# Altium PCB S52最小系统.PcbDoc (part 9 of 9)
Units mm, origin at the board's own origin, x right, y up, seen from the top; angles counter-clockwise.
Board outline 152.4 x 101.6 mm, 2 copper layers (Top Layer, Bottom Layer); 29 components, 53 nets, 176 pads, 2 vias.
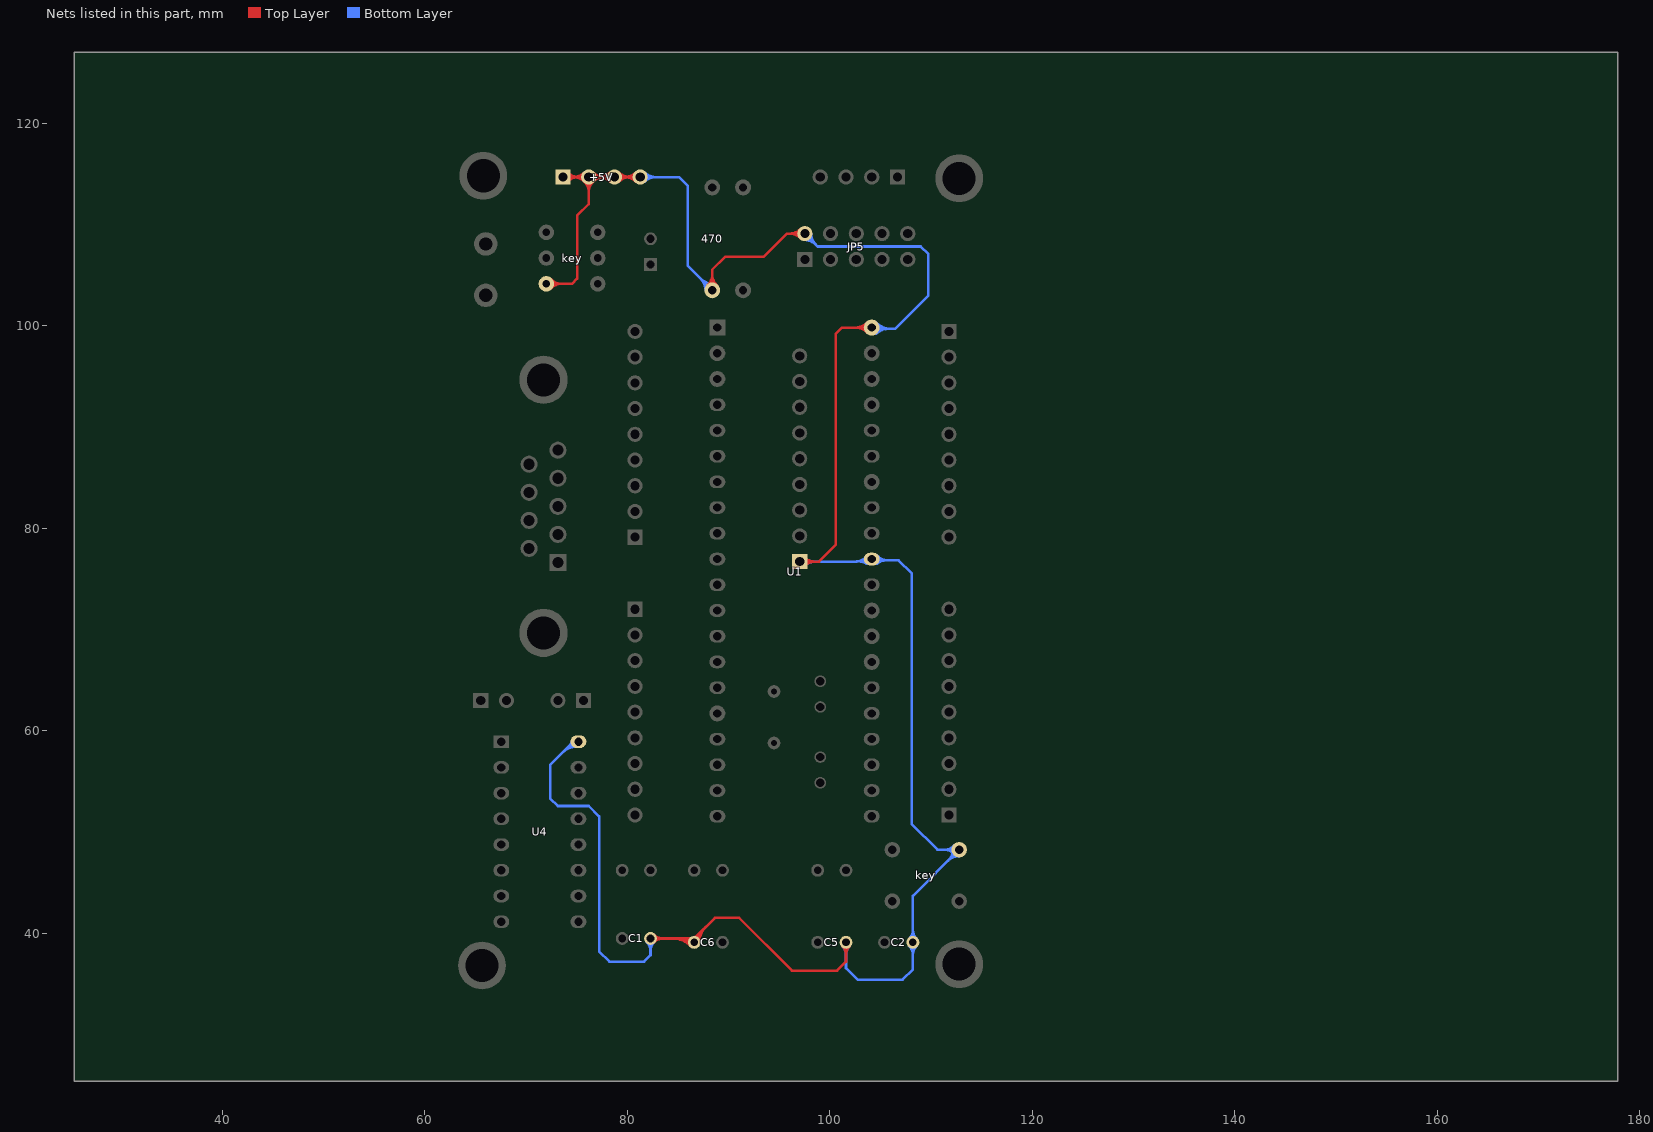
[diagram p9: the nets of this part, all layers, seen from the top]

## Via types
v1: diameter 1.27, hole 0.711, Top Layer to Bottom Layer, 2 vias

## Nets (pads, with @x,y where several pads share a name; then routed paths per layer and width w, separated by ;. In a path a pad name is that pad's centre, name@x,y a point inside that pad or via, vN(x,y) a via of type N, cw(c..) or ccw(c..) an arc to the next point about the centre after c; other vN are vias at no path point) (continued)
VCC: 470.1 +5V.1 +5V.2 +5V.3 +5V.4 ?.1 C1.1 C2.1 C5.1 C6.2 JP5.2 key.1@112.776,48.26 key.2@72.009,104.14 U1.31 U1.40 U4.16 | length 971.8
  Top Layer w0.254: key.2@72.009,104.14 74.549,104.14 75.057,104.648 75.057,110.871 76.2,112.014 +5V.2@76.2,114.681 ; +5V.1@73.66,114.681 +5V.4@81.28,114.681 ; C1.1@82.655,39.138 cw(c83.522,38.271) 83.522,39.497 ; C1.1@82.655,39.856 ccw(c83.522,40.723) 83.522,39.497 ; C6.2@86.487,39.497 C6.2@86.614,39.624 ; 470.1@88.393,103.501 88.393,105.538 89.662,106.807 93.472,106.807 95.758,109.093 JP5.2@97.536,109.093 ; ?.1@97.028,76.708 98.933,76.708 100.584,78.359 100.584,99.187 101.218,99.821 U1.40@104.136,99.821 ; C5.1@101.6,39.116 101.6,37.211 100.711,36.322 96.266,36.322 91.059,41.529 88.646,41.529 86.614,39.497 C6.2@86.614,39.116 ; key.2@72.278,103.871 cw(c72.929,103.22) 72.929,104.14 ; key.2@72.278,103.871 cw(c72.929,103.22) 72.929,104.14 ; key.2@72.278,103.871 cw(c72.929,103.22) 72.929,104.14 ; key.2@72.278,103.871 cw(c72.929,103.22) 72.929,104.14 ; key.2@72.278,103.871 cw(c72.929,103.22) 72.929,104.14 ; key.2@72.278,103.871 cw(c72.929,103.22) 72.929,104.14 ; key.2@72.278,104.409 ccw(c72.929,105.06) 72.929,104.14 ; key.2@72.278,104.409 ccw(c72.929,105.06) 72.929,104.14 ; key.2@72.278,104.409 ccw(c72.929,105.06) 72.929,104.14 ; key.2@72.278,104.409 ccw(c72.929,105.06) 72.929,104.14 ; key.2@72.278,104.409 ccw(c72.929,105.06) 72.929,104.14 ; key.2@72.278,104.409 ccw(c72.929,105.06) 72.929,104.14 ; key.2@72.458,103.691 cw(c73.542,102.607) 73.542,104.14 ; key.2@72.458,103.691 cw(c73.542,102.607) 73.542,104.14 ; key.2@72.458,103.691 cw(c73.542,102.607) 73.542,104.14 ; key.2@72.458,103.691 cw(c73.542,102.607) 73.542,104.14 ; key.2@72.458,103.691 cw(c73.542,102.607) 73.542,104.14 ; key.2@72.458,103.691 cw(c73.542,102.607) 73.542,104.14 ; key.2@72.458,104.589 ccw(c73.542,105.673) 73.542,104.14 ; key.2@72.458,104.589 ccw(c73.542,105.673) 73.542,104.14 ; key.2@72.458,104.589 ccw(c73.542,105.673) 73.542,104.14 ; key.2@72.458,104.589 ccw(c73.542,105.673) 73.542,104.14 ; key.2@72.458,104.589 ccw(c73.542,105.673) 73.542,104.14 ; key.2@72.458,104.589 ccw(c73.542,105.673) 73.542,104.14 ; +5V.1@73.921,114.42 cw(c74.551,113.79) 74.551,114.681 ; +5V.1@73.921,114.42 cw(c74.551,113.79) 74.551,114.681 ; +5V.1@73.921,114.42 cw(c74.551,113.79) 74.551,114.681 ; +5V.1@73.921,114.42 cw(c74.551,113.79) 74.551,114.681 ; +5V.1@73.921,114.42 cw(c74.551,113.79) 74.551,114.681 ; +5V.1@73.921,114.42 cw(c74.551,113.79) 74.551,114.681 ; +5V.1@73.921,114.42 cw(c74.551,113.79) 74.551,114.681 ; +5V.1@73.921,114.942 ccw(c74.551,115.572) 74.551,114.681 ; +5V.1@73.921,114.942 ccw(c74.551,115.572) 74.551,114.681 ; +5V.1@73.921,114.942 ccw(c74.551,115.572) 74.551,114.681 ; +5V.1@73.921,114.942 ccw(c74.551,115.572) 74.551,114.681 ; +5V.1@73.921,114.942 ccw(c74.551,115.572) 74.551,114.681 ; +5V.1@73.921,114.942 ccw(c74.551,115.572) 74.551,114.681 ; +5V.1@73.921,114.942 ccw(c74.551,115.572) 74.551,114.681 ; +5V.1@73.921,114.942 ccw(c74.551,115.572) 74.551,114.681 ; +5V.1@74.101,114.24 cw(c75.164,113.177) 75.164,114.681 ; +5V.1@74.101,114.24 cw(c75.164,113.177) 75.164,114.681 ; +5V.1@74.101,114.24 cw(c75.164,113.177) 75.164,114.681 ; +5V.1@74.101,114.24 cw(c75.164,113.177) 75.164,114.681 ; +5V.1@74.101,114.24 cw(c75.164,113.177) 75.164,114.681 ; +5V.1@74.101,114.24 cw(c75.164,113.177) 75.164,114.681 ; +5V.1@74.101,114.24 cw(c75.164,113.177) 75.164,114.681 ; +5V.1@74.101,114.24 cw(c75.164,113.177) 75.164,114.681 ; +5V.1@74.101,114.24 cw(c75.164,113.177) 75.164,114.681 ; +5V.1@74.101,114.24 cw(c75.164,113.177) 75.164,114.681 ; +5V.1@74.101,115.122 ccw(c75.164,116.185) 75.164,114.681 ; +5V.1@74.101,115.122 ccw(c75.164,116.185) 75.164,114.681 ; +5V.1@74.101,115.122 ccw(c75.164,116.185) 75.164,114.681 ; +5V.1@74.101,115.122 ccw(c75.164,116.185) 75.164,114.681 ; +5V.1@74.101,115.122 ccw(c75.164,116.185) 75.164,114.681 ; +5V.1@74.101,115.122 ccw(c75.164,116.185) 75.164,114.681 ; +5V.1@74.101,115.122 ccw(c75.164,116.185) 75.164,114.681 ; +5V.1@74.101,115.122 ccw(c75.164,116.185) 75.164,114.681 ; +5V.1@74.101,115.122 ccw(c75.164,116.185) 75.164,114.681 ; +5V.1@74.101,115.122 ccw(c75.164,116.185) 75.164,114.681 ; 74.696,114.681 cw(c74.696,113.177) +5V.2@75.759,114.24 ; 74.696,114.681 ccw(c74.696,116.185) +5V.2@75.759,115.122 ; 74.696,114.681 cw(c74.696,113.177) +5V.2@75.759,114.24 ; 74.696,114.681 ccw(c74.696,116.185) +5V.2@75.759,115.122 ; 74.696,114.681 cw(c74.696,113.177) +5V.2@75.759,114.24 ; 74.696,114.681 ccw(c74.696,116.185) +5V.2@75.759,115.122 ; 74.696,114.681 ccw(c74.696,116.185) +5V.2@75.759,115.122 ; 74.696,114.681 cw(c74.696,113.177) +5V.2@75.759,114.24 ; 74.696,114.681 ccw(c74.696,116.185) +5V.2@75.759,115.122 ; 74.696,114.681 cw(c74.696,113.177) +5V.2@75.759,114.24 ; 74.696,114.681 ccw(c74.696,116.185) +5V.2@75.759,115.122 ; 74.696,114.681 cw(c74.696,113.177) +5V.2@75.759,114.24 ; 74.696,114.681 ccw(c74.696,116.185) +5V.2@75.759,115.122 ; 74.696,114.681 cw(c74.696,113.177) +5V.2@75.759,114.24 ; 74.696,114.681 ccw(c74.696,116.185) +5V.2@75.759,115.122 ; 74.696,114.681 cw(c74.696,113.177) +5V.2@75.759,114.24 ; 74.696,114.681 ccw(c74.696,116.185) +5V.2@75.759,115.122 ; 74.696,114.681 cw(c74.696,113.177) +5V.2@75.759,114.24 ; 74.696,114.681 ccw(c74.696,116.185) +5V.2@75.759,115.122 ; 74.696,114.681 cw(c74.696,113.177) +5V.2@75.759,114.24 ; 75.309,114.681 cw(c75.309,113.79) +5V.2@75.939,114.42 ; 75.309,114.681 ccw(c75.309,115.572) +5V.2@75.939,114.942 ; 75.309,114.681 cw(c75.309,113.79) +5V.2@75.939,114.42 ; 75.309,114.681 ccw(c75.309,115.572) +5V.2@75.939,114.942 ; 75.309,114.681 cw(c75.309,113.79) +5V.2@75.939,114.42 ; 75.309,114.681 ccw(c75.309,115.572) +5V.2@75.939,114.942 ; 75.309,114.681 ccw(c75.309,115.572) +5V.2@75.939,114.942 ; 75.309,114.681 cw(c75.309,113.79) +5V.2@75.939,114.42 ; 75.309,114.681 ccw(c75.309,115.572) +5V.2@75.939,114.942 ; 75.309,114.681 cw(c75.309,113.79) +5V.2@75.939,114.42 ; 75.309,114.681 ccw(c75.309,115.572) +5V.2@75.939,114.942 ; 75.309,114.681 cw(c75.309,113.79) +5V.2@75.939,114.42 ; 75.309,114.681 ccw(c75.309,115.572) +5V.2@75.939,114.942 ; 75.309,114.681 cw(c75.309,113.79) +5V.2@75.939,114.42 ; 75.309,114.681 ccw(c75.309,115.572) +5V.2@75.939,114.942 ; 75.309,114.681 cw(c75.309,113.79) +5V.2@75.939,114.42 ; 75.309,114.681 ccw(c75.309,115.572) +5V.2@75.939,114.942 ; 75.309,114.681 cw(c75.309,113.79) +5V.2@75.939,114.42 ; 75.309,114.681 ccw(c75.309,115.572) +5V.2@75.939,114.942 ; 75.309,114.681 cw(c75.309,113.79) +5V.2@75.939,114.42 ; +5V.2@75.759,114.24 cw(c74.696,113.177) 76.2,113.177 ; +5V.2@75.759,114.24 cw(c74.696,113.177) 76.2,113.177 ; +5V.2@75.759,114.24 cw(c74.696,113.177) 76.2,113.177 ; +5V.2@75.759,114.24 cw(c74.696,113.177) 76.2,113.177 ; +5V.2@75.759,114.24 cw(c74.696,113.177) 76.2,113.177 ; +5V.2@75.759,114.24 cw(c74.696,113.177) 76.2,113.177 ; +5V.2@75.759,114.24 cw(c74.696,113.177) 76.2,113.177 ; +5V.2@75.939,114.42 cw(c75.309,113.79) 76.2,113.79 ; +5V.2@75.939,114.42 cw(c75.309,113.79) 76.2,113.79 ; +5V.2@75.939,114.42 cw(c75.309,113.79) 76.2,113.79 ; +5V.2@75.939,114.42 cw(c75.309,113.79) 76.2,113.79 ; +5V.2@75.939,114.42 cw(c75.309,113.79) 76.2,113.79 ; +5V.2@75.939,114.42 cw(c75.309,113.79) 76.2,113.79 ; +5V.2@75.939,114.42 cw(c75.309,113.79) 76.2,113.79 ; 76.2,113.177 cw(c77.704,113.177) +5V.2@76.641,114.24 ; 76.2,113.177 cw(c77.704,113.177) +5V.2@76.641,114.24 ; 76.2,113.177 cw(c77.704,113.177) +5V.2@76.641,114.24 ; 76.2,113.177 cw(c77.704,113.177) +5V.2@76.641,114.24 ; 76.2,113.177 cw(c77.704,113.177) +5V.2@76.641,114.24 ; 76.2,113.177 cw(c77.704,113.177) +5V.2@76.641,114.24 ; 76.2,113.177 cw(c77.704,113.177) +5V.2@76.641,114.24 ; 76.2,113.79 cw(c77.091,113.79) +5V.2@76.461,114.42 ; 76.2,113.79 cw(c77.091,113.79) +5V.2@76.461,114.42 ; 76.2,113.79 cw(c77.091,113.79) +5V.2@76.461,114.42 ; 76.2,113.79 cw(c77.091,113.79) +5V.2@76.461,114.42 ; 76.2,113.79 cw(c77.091,113.79) +5V.2@76.461,114.42 ; 76.2,113.79 cw(c77.091,113.79) +5V.2@76.461,114.42 ; 76.2,113.79 cw(c77.091,113.79) +5V.2@76.461,114.42 ; +5V.2@76.461,114.42 cw(c77.091,113.79) 77.091,114.681 ; +5V.2@76.461,114.42 cw(c77.091,113.79) 77.091,114.681 ; +5V.2@76.461,114.42 cw(c77.091,113.79) 77.091,114.681 ; +5V.2@76.461,114.42 cw(c77.091,113.79) 77.091,114.681 ; +5V.2@76.461,114.42 cw(c77.091,113.79) 77.091,114.681 ; +5V.2@76.461,114.42 cw(c77.091,113.79) 77.091,114.681 ; +5V.2@76.461,114.42 cw(c77.091,113.79) 77.091,114.681 ; +5V.2@76.461,114.42 cw(c77.091,113.79) 77.091,114.681 ; +5V.2@76.461,114.42 cw(c77.091,113.79) 77.091,114.681 ; +5V.2@76.461,114.42 cw(c77.091,113.79) 77.091,114.681 ; +5V.2@76.461,114.942 ccw(c77.091,115.572) 77.091,114.681 ; +5V.2@76.461,114.942 ccw(c77.091,115.572) 77.091,114.681 ; +5V.2@76.461,114.942 ccw(c77.091,115.572) 77.091,114.681 ; +5V.2@76.461,114.942 ccw(c77.091,115.572) 77.091,114.681 ; +5V.2@76.461,114.942 ccw(c77.091,115.572) 77.091,114.681 ; +5V.2@76.461,114.942 ccw(c77.091,115.572) 77.091,114.681 ; +5V.2@76.461,114.942 ccw(c77.091,115.572) 77.091,114.681 ; +5V.2@76.461,114.942 ccw(c77.091,115.572) 77.091,114.681 ; +5V.2@76.461,114.942 ccw(c77.091,115.572) 77.091,114.681 ; +5V.2@76.461,114.942 ccw(c77.091,115.572) 77.091,114.681 ; +5V.2@76.641,114.24 cw(c77.704,113.177) 77.704,114.681 ; +5V.2@76.641,114.24 cw(c77.704,113.177) 77.704,114.681 ; +5V.2@76.641,114.24 cw(c77.704,113.177) 77.704,114.681 ; +5V.2@76.641,114.24 cw(c77.704,113.177) 77.704,114.681 ; +5V.2@76.641,114.24 cw(c77.704,113.177) 77.704,114.681 ; +5V.2@76.641,114.24 cw(c77.704,113.177) 77.704,114.681 ; +5V.2@76.641,114.24 cw(c77.704,113.177) 77.704,114.681 ; +5V.2@76.641,114.24 cw(c77.704,113.177) 77.704,114.681 ; +5V.2@76.641,114.24 cw(c77.704,113.177) 77.704,114.681 ; +5V.2@76.641,114.24 cw(c77.704,113.177) 77.704,114.681 ; +5V.2@76.641,115.122 ccw(c77.704,116.185) 77.704,114.681 ; +5V.2@76.641,115.122 ccw(c77.704,116.185) 77.704,114.681 ; +5V.2@76.641,115.122 ccw(c77.704,116.185) 77.704,114.681 ; +5V.2@76.641,115.122 ccw(c77.704,116.185) 77.704,114.681 ; +5V.2@76.641,115.122 ccw(c77.704,116.185) 77.704,114.681 ; +5V.2@76.641,115.122 ccw(c77.704,116.185) 77.704,114.681 ; +5V.2@76.641,115.122 ccw(c77.704,116.185) 77.704,114.681 ; +5V.2@76.641,115.122 ccw(c77.704,116.185) 77.704,114.681 ; +5V.2@76.641,115.122 ccw(c77.704,116.185) 77.704,114.681 ; +5V.2@76.641,115.122 ccw(c77.704,116.185) 77.704,114.681 ; 77.236,114.681 cw(c77.236,113.177) +5V.3@78.299,114.24 ; 77.236,114.681 ccw(c77.236,116.185) +5V.3@78.299,115.122 ; 77.236,114.681 cw(c77.236,113.177) +5V.3@78.299,114.24 ; 77.236,114.681 ccw(c77.236,116.185) +5V.3@78.299,115.122 ; 77.236,114.681 cw(c77.236,113.177) +5V.3@78.299,114.24 ; 77.236,114.681 ccw(c77.236,116.185) +5V.3@78.299,115.122 ; 77.236,114.681 ccw(c77.236,116.185) +5V.3@78.299,115.122 ; 77.236,114.681 cw(c77.236,113.177) +5V.3@78.299,114.24 ; 77.236,114.681 ccw(c77.236,116.185) +5V.3@78.299,115.122 ; 77.236,114.681 cw(c77.236,113.177) +5V.3@78.299,114.24 ; 77.236,114.681 ccw(c77.236,116.185) +5V.3@78.299,115.122 ; 77.236,114.681 cw(c77.236,113.177) +5V.3@78.299,114.24 ; 77.236,114.681 ccw(c77.236,116.185) +5V.3@78.299,115.122 ; 77.236,114.681 cw(c77.236,113.177) +5V.3@78.299,114.24 ; 77.236,114.681 ccw(c77.236,116.185) +5V.3@78.299,115.122 ; 77.236,114.681 cw(c77.236,113.177) +5V.3@78.299,114.24 ; 77.236,114.681 ccw(c77.236,116.185) +5V.3@78.299,115.122 ; 77.236,114.681 cw(c77.236,113.177) +5V.3@78.299,114.24 ; 77.236,114.681 ccw(c77.236,116.185) +5V.3@78.299,115.122 ; 77.236,114.681 cw(c77.236,113.177) +5V.3@78.299,114.24 ; 77.849,114.681 cw(c77.849,113.79) +5V.3@78.479,114.42 ; 77.849,114.681 ccw(c77.849,115.572) +5V.3@78.479,114.942 ; 77.849,114.681 cw(c77.849,113.79) +5V.3@78.479,114.42 ; 77.849,114.681 ccw(c77.849,115.572) +5V.3@78.479,114.942 ; 77.849,114.681 cw(c77.849,113.79) +5V.3@78.479,114.42 ; 77.849,114.681 ccw(c77.849,115.572) +5V.3@78.479,114.942 ; 77.849,114.681 ccw(c77.849,115.572) +5V.3@78.479,114.942 ; 77.849,114.681 cw(c77.849,113.79) +5V.3@78.479,114.42 ; 77.849,114.681 ccw(c77.849,115.572) +5V.3@78.479,114.942 ; 77.849,114.681 cw(c77.849,113.79) +5V.3@78.479,114.42 ; 77.849,114.681 ccw(c77.849,115.572) +5V.3@78.479,114.942 ; 77.849,114.681 cw(c77.849,113.79) +5V.3@78.479,114.42 ; 77.849,114.681 ccw(c77.849,115.572) +5V.3@78.479,114.942 ; 77.849,114.681 cw(c77.849,113.79) +5V.3@78.479,114.42 ; 77.849,114.681 ccw(c77.849,115.572) +5V.3@78.479,114.942 ; 77.849,114.681 cw(c77.849,113.79) +5V.3@78.479,114.42 ; 77.849,114.681 ccw(c77.849,115.572) +5V.3@78.479,114.942 ; 77.849,114.681 cw(c77.849,113.79) +5V.3@78.479,114.42 ; 77.849,114.681 ccw(c77.849,115.572) +5V.3@78.479,114.942 ; 77.849,114.681 cw(c77.849,113.79) +5V.3@78.479,114.42 ; +5V.3@79.001,114.42 cw(c79.631,113.79) 79.631,114.681 ; +5V.3@79.001,114.42 cw(c79.631,113.79) 79.631,114.681 ; +5V.3@79.001,114.42 cw(c79.631,113.79) 79.631,114.681 ; +5V.3@79.001,114.42 cw(c79.631,113.79) 79.631,114.681 ; +5V.3@79.001,114.42 cw(c79.631,113.79) 79.631,114.681 ; +5V.3@79.001,114.42 cw(c79.631,113.79) 79.631,114.681 ; +5V.3@79.001,114.42 cw(c79.631,113.79) 79.631,114.681 ; +5V.3@79.001,114.42 cw(c79.631,113.79) 79.631,114.681 ; +5V.3@79.001,114.42 cw(c79.631,113.79) 79.631,114.681 ; +5V.3@79.001,114.42 cw(c79.631,113.79) 79.631,114.681 ; +5V.3@79.001,114.942 ccw(c79.631,115.572) 79.631,114.681 ; +5V.3@79.001,114.942 ccw(c79.631,115.572) 79.631,114.681 ; +5V.3@79.001,114.942 ccw(c79.631,115.572) 79.631,114.681 ; +5V.3@79.001,114.942 ccw(c79.631,115.572) 79.631,114.681 ; +5V.3@79.001,114.942 ccw(c79.631,115.572) 79.631,114.681 ; +5V.3@79.001,114.942 ccw(c79.631,115.572) 79.631,114.681 ; +5V.3@79.001,114.942 ccw(c79.631,115.572) 79.631,114.681 ; +5V.3@79.001,114.942 ccw(c79.631,115.572) 79.631,114.681 ; +5V.3@79.001,114.942 ccw(c79.631,115.572) 79.631,114.681 ; +5V.3@79.001,114.942 ccw(c79.631,115.572) 79.631,114.681 ; +5V.3@79.181,114.24 cw(c80.244,113.177) 80.244,114.681 ; +5V.3@79.181,114.24 cw(c80.244,113.177) 80.244,114.681 ; +5V.3@79.181,114.24 cw(c80.244,113.177) 80.244,114.681 ; +5V.3@79.181,114.24 cw(c80.244,113.177) 80.244,114.681 ; +5V.3@79.181,114.24 cw(c80.244,113.177) 80.244,114.681 ; +5V.3@79.181,114.24 cw(c80.244,113.177) 80.244,114.681 ; +5V.3@79.181,114.24 cw(c80.244,113.177) 80.244,114.681 ; +5V.3@79.181,114.24 cw(c80.244,113.177) 80.244,114.681 ; +5V.3@79.181,114.24 cw(c80.244,113.177) 80.244,114.681 ; +5V.3@79.181,114.24 cw(c80.244,113.177) 80.244,114.681 ; +5V.3@79.181,115.122 ccw(c80.244,116.185) 80.244,114.681 ; +5V.3@79.181,115.122 ccw(c80.244,116.185) 80.244,114.681 ; +5V.3@79.181,115.122 ccw(c80.244,116.185) 80.244,114.681 ; +5V.3@79.181,115.122 ccw(c80.244,116.185) 80.244,114.681 ; +5V.3@79.181,115.122 ccw(c80.244,116.185) 80.244,114.681 ; +5V.3@79.181,115.122 ccw(c80.244,116.185) 80.244,114.681 ; +5V.3@79.181,115.122 ccw(c80.244,116.185) 80.244,114.681 ; +5V.3@79.181,115.122 ccw(c80.244,116.185) 80.244,114.681 ; +5V.3@79.181,115.122 ccw(c80.244,116.185) 80.244,114.681 ; +5V.3@79.181,115.122 ccw(c80.244,116.185) 80.244,114.681 ; 79.776,114.681 cw(c79.776,113.177) +5V.4@80.839,114.24 ; 79.776,114.681 ccw(c79.776,116.185) +5V.4@80.839,115.122 ; 79.776,114.681 cw(c79.776,113.177) +5V.4@80.839,114.24 ; 79.776,114.681 ccw(c79.776,116.185) +5V.4@80.839,115.122 ; 79.776,114.681 cw(c79.776,113.177) +5V.4@80.839,114.24 ; 79.776,114.681 ccw(c79.776,116.185) +5V.4@80.839,115.122 ; 79.776,114.681 ccw(c79.776,116.185) +5V.4@80.839,115.122 ; 79.776,114.681 cw(c79.776,113.177) +5V.4@80.839,114.24 ; 79.776,114.681 ccw(c79.776,116.185) +5V.4@80.839,115.122 ; 79.776,114.681 cw(c79.776,113.177) +5V.4@80.839,114.24 ; 79.776,114.681 ccw(c79.776,116.185) +5V.4@80.839,115.122 ; 79.776,114.681 cw(c79.776,113.177) +5V.4@80.839,114.24 ; 79.776,114.681 ccw(c79.776,116.185) +5V.4@80.839,115.122 ; 79.776,114.681 cw(c79.776,113.177) +5V.4@80.839,114.24 ; 79.776,114.681 ccw(c79.776,116.185) +5V.4@80.839,115.122 ; 79.776,114.681 cw(c79.776,113.177) +5V.4@80.839,114.24 ; 79.776,114.681 ccw(c79.776,116.185) +5V.4@80.839,115.122 ; 79.776,114.681 cw(c79.776,113.177) +5V.4@80.839,114.24 ; 79.776,114.681 ccw(c79.776,116.185) +5V.4@80.839,115.122 ; 79.776,114.681 cw(c79.776,113.177) +5V.4@80.839,114.24 ; 80.389,114.681 cw(c80.389,113.79) +5V.4@81.019,114.42 ; 80.389,114.681 ccw(c80.389,115.572) +5V.4@81.019,114.942 ; 80.389,114.681 cw(c80.389,113.79) +5V.4@81.019,114.42 ; 80.389,114.681 ccw(c80.389,115.572) +5V.4@81.019,114.942 ; 80.389,114.681 cw(c80.389,113.79) +5V.4@81.019,114.42 ; 80.389,114.681 ccw(c80.389,115.572) +5V.4@81.019,114.942 ; 80.389,114.681 ccw(c80.389,115.572) +5V.4@81.019,114.942 ; 80.389,114.681 cw(c80.389,113.79) +5V.4@81.019,114.42 ; 80.389,114.681 ccw(c80.389,115.572) +5V.4@81.019,114.942 ; 80.389,114.681 cw(c80.389,113.79) +5V.4@81.019,114.42 ; 80.389,114.681 ccw(c80.389,115.572) +5V.4@81.019,114.942 ; 80.389,114.681 cw(c80.389,113.79) +5V.4@81.019,114.42 ; 80.389,114.681 ccw(c80.389,115.572) +5V.4@81.019,114.942 ; 80.389,114.681 cw(c80.389,113.79) +5V.4@81.019,114.42 ; 80.389,114.681 ccw(c80.389,115.572) +5V.4@81.019,114.942 ; 80.389,114.681 cw(c80.389,113.79) +5V.4@81.019,114.42 ; 80.389,114.681 ccw(c80.389,115.572) +5V.4@81.019,114.942 ; 80.389,114.681 cw(c80.389,113.79) +5V.4@81.019,114.42 ; 80.389,114.681 ccw(c80.389,115.572) +5V.4@81.019,114.942 ; 80.389,114.681 cw(c80.389,113.79) +5V.4@81.019,114.42 ; 83.522,39.497 86.233,39.497 C6.2@86.614,39.116 ; 84.468,39.497 cw(c84.468,36.97) C6.2@86.255,38.757 ; 84.468,39.497 cw(c84.468,36.97) C6.2@86.255,38.757 ; 84.468,39.497 cw(c84.468,36.97) C6.2@86.255,38.757 ; 84.468,39.497 cw(c84.468,36.97) C6.2@86.255,38.757 ; 84.468,39.497 cw(c84.468,36.97) C6.2@86.255,38.757 ; 84.468,39.497 cw(c84.468,36.97) C6.2@86.255,38.757 ; 84.468,39.497 cw(c84.468,36.97) C6.2@86.255,38.757 ; 84.468,39.497 cw(c84.468,36.97) C6.2@86.255,38.757 ; 84.468,39.497 cw(c84.468,36.97) C6.2@86.255,38.757 ; 85.081,39.497 cw(c85.081,37.583) C6.2@86.434,38.936 ; 85.081,39.497 cw(c85.081,37.583) C6.2@86.434,38.936 ; 85.081,39.497 cw(c85.081,37.583) C6.2@86.434,38.936 ; 85.081,39.497 cw(c85.081,37.583) C6.2@86.434,38.936 ; 85.081,39.497 cw(c85.081,37.583) C6.2@86.434,38.936 ; 85.081,39.497 cw(c85.081,37.583) C6.2@86.434,38.936 ; 85.081,39.497 cw(c85.081,37.583) C6.2@86.434,38.936 ; 85.081,39.497 cw(c85.081,37.583) C6.2@86.434,38.936 ; 85.081,39.497 cw(c85.081,37.583) C6.2@86.434,38.936 ; 85.694,39.497 cw(c85.694,38.196) C6.2@86.614,39.116 ; 85.694,39.497 cw(c85.694,38.196) C6.2@86.614,39.116 ; 85.694,39.497 cw(c85.694,38.196) C6.2@86.614,39.116 ; 85.694,39.497 cw(c85.694,38.196) C6.2@86.614,39.116 ; 85.694,39.497 cw(c85.694,38.196) C6.2@86.614,39.116 ; 85.694,39.497 cw(c85.694,38.196) C6.2@86.614,39.116 ; 85.694,39.497 cw(c85.694,38.196) C6.2@86.614,39.116 ; 85.694,39.497 cw(c85.694,38.196) C6.2@86.614,39.116 ; 85.694,39.497 cw(c85.694,38.196) C6.2@86.614,39.116 ; C6.2@86.614,39.116 cw(c87.534,39.116) 86.883,39.766 ; C6.2@86.614,39.116 cw(c87.534,39.116) 86.883,39.766 ; C6.2@86.614,39.116 cw(c87.534,39.116) 86.883,39.766 ; C6.2@86.614,39.116 cw(c87.534,39.116) 86.883,39.766 ; C6.2@86.614,39.116 cw(c87.534,39.116) 86.883,39.766 ; C6.2@86.614,39.116 cw(c87.534,39.116) 86.883,39.766 ; C6.2@86.614,39.116 cw(c87.534,39.116) 86.883,39.766 ; C6.2@86.614,39.116 cw(c87.534,39.116) 86.883,39.766 ; C6.2@86.614,39.116 cw(c87.534,39.116) 86.883,39.766 ; C6.2@86.614,39.624 ccw(c86.614,39.931) 86.831,39.714 ; C6.2@86.614,39.624 ccw(c86.614,39.931) 86.831,39.714 ; C6.2@86.614,39.624 ccw(c86.614,39.931) 86.831,39.714 ; C6.2@86.614,39.624 ccw(c86.614,39.931) 86.831,39.714 ; C6.2@86.614,39.624 ccw(c86.614,39.931) 86.831,39.714 ; C6.2@86.614,39.624 ccw(c86.614,39.931) 86.831,39.714 ; C6.2@86.614,39.624 ccw(c86.614,39.931) 86.831,39.714 ; C6.2@86.614,39.624 ccw(c86.614,39.931) 86.831,39.714 ; C6.2@86.614,39.624 ccw(c86.614,39.931) 86.831,39.714 ; C6.2@86.868,39.116 cw(c88.401,39.116) 87.317,40.2 ; C6.2@86.868,39.116 cw(c88.401,39.116) 87.317,40.2 ; C6.2@86.868,39.116 cw(c88.401,39.116) 87.317,40.2 ; C6.2@86.868,39.116 cw(c88.401,39.116) 87.317,40.2 ; C6.2@86.868,39.116 cw(c88.401,39.116) 87.317,40.2 ; C6.2@86.868,39.116 cw(c88.401,39.116) 87.317,40.2 ; C6.2@86.868,39.116 cw(c88.401,39.116) 87.317,40.2 ; C6.2@86.868,39.116 cw(c88.401,39.116) 87.317,40.2 ; C6.2@86.868,39.116 cw(c88.401,39.116) 87.317,40.2 ; C6.2@87.122,39.116 cw(c89.268,39.116) 87.751,40.634 ; C6.2@87.122,39.116 cw(c89.268,39.116) 87.751,40.634 ; C6.2@87.122,39.116 cw(c89.268,39.116) 87.751,40.634 ; C6.2@87.122,39.116 cw(c89.268,39.116) 87.751,40.634 ; C6.2@87.122,39.116 cw(c89.268,39.116) 87.751,40.634 ; C6.2@87.122,39.116 cw(c89.268,39.116) 87.751,40.634 ; C6.2@87.122,39.116 cw(c89.268,39.116) 87.751,40.634 ; C6.2@87.122,39.116 cw(c89.268,39.116) 87.751,40.634 ; C6.2@87.122,39.116 cw(c89.268,39.116) 87.751,40.634 ; 470.1@87.926,103.968 ccw(c86.799,105.096) 88.393,105.096 ; 470.1@87.926,103.968 ccw(c86.799,105.096) 88.393,105.096 ; 470.1@87.926,103.968 ccw(c86.799,105.096) 88.393,105.096 ; 470.1@87.926,103.968 ccw(c86.799,105.096) 88.393,105.096 ; 470.1@87.926,103.968 ccw(c86.799,105.096) 88.393,105.096 ; 470.1@87.926,103.968 ccw(c86.799,105.096) 88.393,105.096 ; 470.1@87.926,103.968 ccw(c86.799,105.096) 88.393,105.096 ; 470.1@87.926,103.968 ccw(c86.799,105.096) 88.393,105.096 ; 470.1@87.926,103.968 ccw(c86.799,105.096) 88.393,105.096 ; 470.1@87.926,103.968 ccw(c86.799,105.096) 88.393,105.096 ; 470.1@88.106,103.789 ccw(c87.412,104.482) 88.393,104.482 ; 470.1@88.106,103.789 ccw(c87.412,104.482) 88.393,104.482 ; 470.1@88.106,103.789 ccw(c87.412,104.482) 88.393,104.482 ; 470.1@88.106,103.789 ccw(c87.412,104.482) 88.393,104.482 ; 470.1@88.106,103.789 ccw(c87.412,104.482) 88.393,104.482 ; 470.1@88.106,103.789 ccw(c87.412,104.482) 88.393,104.482 ; 470.1@88.106,103.789 ccw(c87.412,104.482) 88.393,104.482 ; 470.1@88.106,103.789 ccw(c87.412,104.482) 88.393,104.482 ; 470.1@88.106,103.789 ccw(c87.412,104.482) 88.393,104.482 ; 470.1@88.106,103.789 ccw(c87.412,104.482) 88.393,104.482 ; 88.393,104.482 ccw(c89.374,104.482) 470.1@88.68,103.789 ; 88.393,104.482 ccw(c89.374,104.482) 470.1@88.68,103.789 ; 88.393,104.482 ccw(c89.374,104.482) 470.1@88.68,103.789 ; 88.393,104.482 ccw(c89.374,104.482) 470.1@88.68,103.789 ; 88.393,104.482 ccw(c89.374,104.482) 470.1@88.68,103.789 ; 88.393,104.482 ccw(c89.374,104.482) 470.1@88.68,103.789 ; 88.393,104.482 ccw(c89.374,104.482) 470.1@88.68,103.789 ; 88.393,104.482 ccw(c89.374,104.482) 470.1@88.68,103.789 ; 88.393,104.482 ccw(c89.374,104.482) 470.1@88.68,103.789 ; 88.393,104.482 ccw(c89.374,104.482) 470.1@88.68,103.789 ; 88.393,105.096 ccw(c89.987,105.096) 470.1@88.86,103.968 ; 88.393,105.096 ccw(c89.987,105.096) 470.1@88.86,103.968 ; 88.393,105.096 ccw(c89.987,105.096) 470.1@88.86,103.968 ; 88.393,105.096 ccw(c89.987,105.096) 470.1@88.86,103.968 ; 88.393,105.096 ccw(c89.987,105.096) 470.1@88.86,103.968 ; 88.393,105.096 ccw(c89.987,105.096) 470.1@88.86,103.968 ; 88.393,105.096 ccw(c89.987,105.096) 470.1@88.86,103.968 ; 88.393,105.096 ccw(c89.987,105.096) 470.1@88.86,103.968 ; 88.393,105.096 ccw(c89.987,105.096) 470.1@88.86,103.968 ; 88.393,105.096 ccw(c89.987,105.096) 470.1@88.86,103.968 ; 96.032,109.093 cw(c96.032,107.589) JP5.2@97.095,108.652 ; 96.032,109.093 ccw(c96.032,110.597) JP5.2@97.095,109.534 ; 96.032,109.093 cw(c96.032,107.589) JP5.2@97.095,108.652 ; 96.032,109.093 ccw(c96.032,110.597) JP5.2@97.095,109.534 ; 96.032,109.093 cw(c96.032,107.589) JP5.2@97.095,108.652 ; 96.032,109.093 ccw(c96.032,110.597) JP5.2@97.095,109.534 ; 96.032,109.093 ccw(c96.032,110.597) JP5.2@97.095,109.534 ; 96.032,109.093 cw(c96.032,107.589) JP5.2@97.095,108.652 ; 96.032,109.093 ccw(c96.032,110.597) JP5.2@97.095,109.534 ; 96.032,109.093 cw(c96.032,107.589) JP5.2@97.095,108.652 ; 96.032,109.093 ccw(c96.032,110.597) JP5.2@97.095,109.534 ; 96.032,109.093 cw(c96.032,107.589) JP5.2@97.095,108.652 ; 96.032,109.093 ccw(c96.032,110.597) JP5.2@97.095,109.534 ; 96.032,109.093 cw(c96.032,107.589) JP5.2@97.095,108.652 ; 96.032,109.093 ccw(c96.032,110.597) JP5.2@97.095,109.534 ; 96.032,109.093 cw(c96.032,107.589) JP5.2@97.095,108.652 ; 96.032,109.093 ccw(c96.032,110.597) JP5.2@97.095,109.534 ; 96.032,109.093 cw(c96.032,107.589) JP5.2@97.095,108.652 ; 96.032,109.093 ccw(c96.032,110.597) JP5.2@97.095,109.534 ; 96.032,109.093 cw(c96.032,107.589) JP5.2@97.095,108.652 ; 96.645,109.093 cw(c96.645,108.202) JP5.2@97.275,108.832 ; 96.645,109.093 ccw(c96.645,109.984) JP5.2@97.275,109.354 ; 96.645,109.093 cw(c96.645,108.202) JP5.2@97.275,108.832 ; 96.645,109.093 ccw(c96.645,109.984) JP5.2@97.275,109.354 ; 96.645,109.093 cw(c96.645,108.202) JP5.2@97.275,108.832 ; 96.645,109.093 ccw(c96.645,109.984) JP5.2@97.275,109.354 ; 96.645,109.093 ccw(c96.645,109.984) JP5.2@97.275,109.354 ; 96.645,109.093 cw(c96.645,108.202) JP5.2@97.275,108.832 ; 96.645,109.093 ccw(c96.645,109.984) JP5.2@97.275,109.354 ; 96.645,109.093 cw(c96.645,108.202) JP5.2@97.275,108.832 ; 96.645,109.093 ccw(c96.645,109.984) JP5.2@97.275,109.354 ; 96.645,109.093 cw(c96.645,108.202) JP5.2@97.275,108.832 ; 96.645,109.093 ccw(c96.645,109.984) JP5.2@97.275,109.354 ; 96.645,109.093 cw(c96.645,108.202) JP5.2@97.275,108.832 ; 96.645,109.093 ccw(c96.645,109.984) JP5.2@97.275,109.354 ; 96.645,109.093 cw(c96.645,108.202) JP5.2@97.275,108.832 ; 96.645,109.093 ccw(c96.645,109.984) JP5.2@97.275,109.354 ; 96.645,109.093 cw(c96.645,108.202) JP5.2@97.275,108.832 ; 96.645,109.093 ccw(c96.645,109.984) JP5.2@97.275,109.354 ; 96.645,109.093 cw(c96.645,108.202) JP5.2@97.275,108.832 ; ?.1@97.289,76.447 cw(c97.919,75.817) 97.919,76.708 ; ?.1@97.289,76.447 cw(c97.919,75.817) 97.919,76.708 ; ?.1@97.289,76.447 cw(c97.919,75.817) 97.919,76.708 ; ?.1@97.289,76.969 ccw(c97.919,77.599) 97.919,76.708 ; ?.1@97.289,76.969 ccw(c97.919,77.599) 97.919,76.708 ; ?.1@97.289,76.969 ccw(c97.919,77.599) 97.919,76.708 ; ?.1@97.469,76.267 cw(c98.532,75.204) 98.532,76.708 ; ?.1@97.469,76.267 cw(c98.532,75.204) 98.532,76.708 ; ?.1@97.469,76.267 cw(c98.532,75.204) 98.532,76.708 ; ?.1@97.469,77.149 ccw(c98.532,78.212) 98.532,76.708 ; ?.1@97.469,77.149 ccw(c98.532,78.212) 98.532,76.708 ; ?.1@97.469,77.149 ccw(c98.532,78.212) 98.532,76.708 ; C5.1@101.241,38.757 cw(c100.374,37.89) 101.6,37.89 ; C5.1@101.241,38.757 cw(c100.374,37.89) 101.6,37.89 ; C5.1@101.241,38.757 cw(c100.374,37.89) 101.6,37.89 ; C5.1@101.241,38.757 cw(c100.374,37.89) 101.6,37.89 ; C5.1@101.241,38.757 cw(c100.374,37.89) 101.6,37.89 ; C5.1@101.241,38.757 cw(c100.374,37.89) 101.6,37.89 ; C5.1@101.241,38.757 cw(c100.374,37.89) 101.6,37.89 ; C5.1@101.241,38.757 cw(c100.374,37.89) 101.6,37.89 ; C5.1@101.241,38.757 cw(c100.374,37.89) 101.6,37.89 ; 101.6,37.89 cw(c102.826,37.89) C5.1@101.959,38.757 ; 101.6,37.89 cw(c102.826,37.89) C5.1@101.959,38.757 ; 101.6,37.89 cw(c102.826,37.89) C5.1@101.959,38.757 ; 101.6,37.89 cw(c102.826,37.89) C5.1@101.959,38.757 ; 101.6,37.89 cw(c102.826,37.89) C5.1@101.959,38.757 ; 101.6,37.89 cw(c102.826,37.89) C5.1@101.959,38.757 ; 101.6,37.89 cw(c102.826,37.89) C5.1@101.959,38.757 ; 101.6,37.89 cw(c102.826,37.89) C5.1@101.959,38.757 ; 101.6,37.89 cw(c102.826,37.89) C5.1@101.959,38.757 ; 102.542,99.821 cw(c102.542,98.227) U1.40@103.669,99.354 ; 102.542,99.821 ccw(c102.542,101.415) U1.40@103.669,100.288 ; 102.542,99.821 cw(c102.542,98.227) U1.40@103.669,99.354 ; 102.542,99.821 ccw(c102.542,101.415) U1.40@103.669,100.288 ; 102.542,99.821 ccw(c102.542,101.415) U1.40@103.669,100.288 ; 102.542,99.821 cw(c102.542,98.227) U1.40@103.669,99.354 ; 103.155,99.821 cw(c103.155,98.84) U1.40@103.849,99.534 ; 103.155,99.821 ccw(c103.155,100.802) U1.40@103.849,100.108 ; 103.155,99.821 cw(c103.155,98.84) U1.40@103.849,99.534 ; 103.155,99.821 ccw(c103.155,100.802) U1.40@103.849,100.108 ; 103.155,99.821 ccw(c103.155,100.802) U1.40@103.849,100.108 ; 103.155,99.821 cw(c103.155,98.84) U1.40@103.849,99.534
  Bottom Layer w0.254: U4.16@75.18,58.927 74.675,58.927 72.39,56.642 72.39,53.34 73.152,52.578 76.2,52.578 77.216,51.562 77.216,38.227 78.232,37.211 81.661,37.211 82.296,37.846 C1.1@82.296,39.497 ; +5V.4@81.28,114.681 85.09,114.681 85.979,113.792 85.979,105.915 470.1@88.393,103.501 ; ?.1@97.028,76.708 102.467,76.708 ccw(c102.467,78.341) U1.31@103.622,77.186 ; JP5.2@97.536,108.47 cw(c97.536,106.966) 98.6,108.029 cw(c99.663,109.093) JP5.2@98.159,109.093 ; JP5.2@97.536,108.724 cw(c97.536,107.833) 98.166,108.463 cw(c98.796,109.093) JP5.2@97.905,109.093 ; JP5.2@97.536,109.093 98.806,107.823 108.966,107.823 109.728,107.061 109.728,102.997 106.425,99.694 U1.40@104.136,99.694 ; C5.1@101.6,39.116 101.6,36.576 102.743,35.433 107.188,35.433 108.204,36.449 108.204,43.688 key.1@112.776,48.26 110.617,48.26 108.078,50.799 108.078,75.562 106.806,76.834 U1.31@104.136,76.834 ; 103.076,76.708 cw(c103.076,75.936) U1.31@103.622,76.482 ; 103.08,76.708 ccw(c103.08,77.727) U1.31@103.801,77.007 ; U1.40@104.424,99.407 cw(c105.117,98.713) 105.117,99.694 cw(c105.117,100.675) U1.40@104.424,99.981 ; U1.31@104.651,76.482 cw(c105.501,75.632) 105.501,76.834 cw(c105.501,78.036) U1.31@104.651,77.186 ; 73.582,57.834 cw(c75.018,56.399) U4.16@75.018,58.429 ; 73.582,57.834 cw(c75.018,56.399) U4.16@75.018,58.429 ; 73.582,57.834 cw(c75.018,56.399) U4.16@75.018,58.429 ; 73.582,57.834 cw(c75.018,56.399) U4.16@75.018,58.429 ; 73.582,57.834 cw(c75.018,56.399) U4.16@75.018,58.429 ; 73.582,57.834 cw(c75.018,56.399) U4.16@75.018,58.429 ; 73.582,57.834 cw(c75.018,56.399) U4.16@75.018,58.429 ; 73.582,57.834 cw(c75.018,56.399) U4.16@75.018,58.429 ; 73.582,57.834 cw(c75.018,56.399) U4.16@75.018,58.429 ; 73.582,57.834 cw(c75.018,56.399) U4.16@75.018,58.429 ; 74.016,58.268 cw(c75.018,57.266) U4.16@75.018,58.683 ; 74.016,58.268 cw(c75.018,57.266) U4.16@75.018,58.683 ; 74.016,58.268 cw(c75.018,57.266) U4.16@75.018,58.683 ; 74.016,58.268 cw(c75.018,57.266) U4.16@75.018,58.683 ; 74.016,58.268 cw(c75.018,57.266) U4.16@75.018,58.683 ; 74.016,58.268 cw(c75.018,57.266) U4.16@75.018,58.683 ; 74.016,58.268 cw(c75.018,57.266) U4.16@75.018,58.683 ; 74.016,58.268 cw(c75.018,57.266) U4.16@75.018,58.683 ; 74.016,58.268 cw(c75.018,57.266) U4.16@75.018,58.683 ; 74.016,58.268 cw(c75.018,57.266) U4.16@75.018,58.683 ; 74.41,58.662 ccw(c74.145,58.927) U4.16@74.52,58.927 ; 74.41,58.662 ccw(c74.145,58.927) U4.16@74.52,58.927 ; 74.41,58.662 ccw(c74.145,58.927) U4.16@74.52,58.927 ; 74.41,58.662 ccw(c74.145,58.927) U4.16@74.52,58.927 ; 74.41,58.662 ccw(c74.145,58.927) U4.16@74.52,58.927 ; 74.41,58.662 ccw(c74.145,58.927) U4.16@74.52,58.927 ; 74.41,58.662 ccw(c74.145,58.927) U4.16@74.52,58.927 ; 74.41,58.662 ccw(c74.145,58.927) U4.16@74.52,58.927 ; 74.41,58.662 ccw(c74.145,58.927) U4.16@74.52,58.927 ; 74.41,58.662 ccw(c74.145,58.927) U4.16@74.52,58.927 ; +5V.4@81.541,114.42 cw(c82.171,113.79) 82.171,114.681 ; +5V.4@81.541,114.42 cw(c82.171,113.79) 82.171,114.681 ; +5V.4@81.541,114.42 cw(c82.171,113.79) 82.171,114.681 ; +5V.4@81.541,114.42 cw(c82.171,113.79) 82.171,114.681 ; +5V.4@81.541,114.42 cw(c82.171,113.79) 82.171,114.681 ; +5V.4@81.541,114.42 cw(c82.171,113.79) 82.171,114.681 ; +5V.4@81.541,114.42 cw(c82.171,113.79) 82.171,114.681 ; +5V.4@81.541,114.42 cw(c82.171,113.79) 82.171,114.681 ; +5V.4@81.541,114.42 cw(c82.171,113.79) 82.171,114.681 ; +5V.4@81.541,114.42 cw(c82.171,113.79) 82.171,114.681 ; +5V.4@81.541,114.942 ccw(c82.171,115.572) 82.171,114.681 ; +5V.4@81.541,114.942 ccw(c82.171,115.572) 82.171,114.681 ; +5V.4@81.541,114.942 ccw(c82.171,115.572) 82.171,114.681 ; +5V.4@81.541,114.942 ccw(c82.171,115.572) 82.171,114.681 ; +5V.4@81.541,114.942 ccw(c82.171,115.572) 82.171,114.681 ; +5V.4@81.541,114.942 ccw(c82.171,115.572) 82.171,114.681 ; +5V.4@81.541,114.942 ccw(c82.171,115.572) 82.171,114.681 ; +5V.4@81.541,114.942 ccw(c82.171,115.572) 82.171,114.681 ; +5V.4@81.541,114.942 ccw(c82.171,115.572) 82.171,114.681 ; +5V.4@81.541,114.942 ccw(c82.171,115.572) 82.171,114.681 ; +5V.4@81.721,114.24 cw(c82.784,113.177) 82.784,114.681 ; +5V.4@81.721,114.24 cw(c82.784,113.177) 82.784,114.681 ; +5V.4@81.721,114.24 cw(c82.784,113.177) 82.784,114.681 ; +5V.4@81.721,114.24 cw(c82.784,113.177) 82.784,114.681 ; +5V.4@81.721,114.24 cw(c82.784,113.177) 82.784,114.681 ; +5V.4@81.721,114.24 cw(c82.784,113.177) 82.784,114.681 ; +5V.4@81.721,114.24 cw(c82.784,113.177) 82.784,114.681 ; +5V.4@81.721,114.24 cw(c82.784,113.177) 82.784,114.681 ; +5V.4@81.721,114.24 cw(c82.784,113.177) 82.784,114.681 ; +5V.4@81.721,114.24 cw(c82.784,113.177) 82.784,114.681 ; +5V.4@81.721,115.122 ccw(c82.784,116.185) 82.784,114.681 ; +5V.4@81.721,115.122 ccw(c82.784,116.185) 82.784,114.681 ; +5V.4@81.721,115.122 ccw(c82.784,116.185) 82.784,114.681 ; +5V.4@81.721,115.122 ccw(c82.784,116.185) 82.784,114.681 ; +5V.4@81.721,115.122 ccw(c82.784,116.185) 82.784,114.681 ; +5V.4@81.721,115.122 ccw(c82.784,116.185) 82.784,114.681 ; +5V.4@81.721,115.122 ccw(c82.784,116.185) 82.784,114.681 ; +5V.4@81.721,115.122 ccw(c82.784,116.185) 82.784,114.681 ; +5V.4@81.721,115.122 ccw(c82.784,116.185) 82.784,114.681 ; +5V.4@81.721,115.122 ccw(c82.784,116.185) 82.784,114.681 ; C1.1@81.937,39.138 cw(c81.07,38.271) 82.296,38.271 ; C1.1@81.937,39.138 cw(c81.07,38.271) 82.296,38.271 ; C1.1@81.937,39.138 cw(c81.07,38.271) 82.296,38.271 ; C1.1@81.937,39.138 cw(c81.07,38.271) 82.296,38.271 ; C1.1@81.937,39.138 cw(c81.07,38.271) 82.296,38.271 ; C1.1@81.937,39.138 cw(c81.07,38.271) 82.296,38.271 ; C1.1@81.937,39.138 cw(c81.07,38.271) 82.296,38.271 ; C1.1@81.937,39.138 cw(c81.07,38.271) 82.296,38.271 ; C1.1@81.937,39.138 cw(c81.07,38.271) 82.296,38.271 ; C1.1@81.937,39.138 cw(c81.07,38.271) 82.296,38.271 ; 82.296,38.271 cw(c83.522,38.271) C1.1@82.655,39.138 ; 82.296,38.271 cw(c83.522,38.271) C1.1@82.655,39.138 ; 82.296,38.271 cw(c83.522,38.271) C1.1@82.655,39.138 ; 82.296,38.271 cw(c83.522,38.271) C1.1@82.655,39.138 ; 82.296,38.271 cw(c83.522,38.271) C1.1@82.655,39.138 ; 82.296,38.271 cw(c83.522,38.271) C1.1@82.655,39.138 ; 82.296,38.271 cw(c83.522,38.271) C1.1@82.655,39.138 ; 82.296,38.271 cw(c83.522,38.271) C1.1@82.655,39.138 ; 82.296,38.271 cw(c83.522,38.271) C1.1@82.655,39.138 ; 82.296,38.271 cw(c83.522,38.271) C1.1@82.655,39.138 ; 87.266,104.629 cw(c86.138,103.501) 470.1@87.733,103.501 ; 87.266,104.629 ccw(c88.393,105.756) 470.1@88.393,104.162 ; 87.266,104.629 cw(c86.138,103.501) 470.1@87.733,103.501 ; 87.266,104.629 ccw(c88.393,105.756) 470.1@88.393,104.162 ; 87.266,104.629 cw(c86.138,103.501) 470.1@87.733,103.501 ; 87.266,104.629 ccw(c88.393,105.756) 470.1@88.393,104.162 ; 87.266,104.629 ccw(c88.393,105.756) 470.1@88.393,104.162 ; 87.266,104.629 cw(c86.138,103.501) 470.1@87.733,103.501 ; 87.266,104.629 ccw(c88.393,105.756) 470.1@88.393,104.162 ; 87.266,104.629 cw(c86.138,103.501) 470.1@87.733,103.501 ; 87.266,104.629 ccw(c88.393,105.756) 470.1@88.393,104.162 ; 87.266,104.629 cw(c86.138,103.501) 470.1@87.733,103.501 ; 87.266,104.629 ccw(c88.393,105.756) 470.1@88.393,104.162 ; 87.266,104.629 cw(c86.138,103.501) 470.1@87.733,103.501 ; 87.266,104.629 ccw(c88.393,105.756) 470.1@88.393,104.162 ; 87.266,104.629 cw(c86.138,103.501) 470.1@87.733,103.501 ; 87.266,104.629 ccw(c88.393,105.756) 470.1@88.393,104.162 ; 87.266,104.629 cw(c86.138,103.501) 470.1@87.733,103.501 ; 87.266,104.629 ccw(c88.393,105.756) 470.1@88.393,104.162 ; 87.266,104.629 cw(c86.138,103.501) 470.1@87.733,103.501 ; 87.699,104.195 cw(c87.005,103.501) 470.1@87.987,103.501 ; 87.699,104.195 ccw(c88.393,104.889) 470.1@88.393,103.908 ; 87.699,104.195 cw(c87.005,103.501) 470.1@87.987,103.501 ; 87.699,104.195 ccw(c88.393,104.889) 470.1@88.393,103.908 ; 87.699,104.195 cw(c87.005,103.501) 470.1@87.987,103.501 ; 87.699,104.195 ccw(c88.393,104.889) 470.1@88.393,103.908 ; 87.699,104.195 ccw(c88.393,104.889) 470.1@88.393,103.908 ; 87.699,104.195 cw(c87.005,103.501) 470.1@87.987,103.501 ; 87.699,104.195 ccw(c88.393,104.889) 470.1@88.393,103.908 ; 87.699,104.195 cw(c87.005,103.501) 470.1@87.987,103.501 ; 87.699,104.195 ccw(c88.393,104.889) 470.1@88.393,103.908 ; 87.699,104.195 cw(c87.005,103.501) 470.1@87.987,103.501 ; 87.699,104.195 ccw(c88.393,104.889) 470.1@88.393,103.908 ; 87.699,104.195 cw(c87.005,103.501) 470.1@87.987,103.501 ; 87.699,104.195 ccw(c88.393,104.889) 470.1@88.393,103.908 ; 87.699,104.195 cw(c87.005,103.501) 470.1@87.987,103.501 ; 87.699,104.195 ccw(c88.393,104.889) 470.1@88.393,103.908 ; 87.699,104.195 cw(c87.005,103.501) 470.1@87.987,103.501 ; 87.699,104.195 ccw(c88.393,104.889) 470.1@88.393,103.908 ; 87.699,104.195 cw(c87.005,103.501) 470.1@87.987,103.501 ; ?.1@97.289,76.447 cw(c97.919,75.817) 97.919,76.708 ; ?.1@97.289,76.447 cw(c97.919,75.817) 97.919,76.708 ; ?.1@97.289,76.447 cw(c97.919,75.817) 97.919,76.708 ; ?.1@97.289,76.447 cw(c97.919,75.817) 97.919,76.708 ; ?.1@97.289,76.969 ccw(c97.919,77.599) 97.919,76.708 ; ?.1@97.289,76.969 ccw(c97.919,77.599) 97.919,76.708 ; ?.1@97.289,76.969 ccw(c97.919,77.599) 97.919,76.708 ; ?.1@97.289,76.969 ccw(c97.919,77.599) 97.919,76.708 ; ?.1@97.469,76.267 cw(c98.532,75.204) 98.532,76.708 ; ?.1@97.469,76.267 cw(c98.532,75.204) 98.532,76.708 ; ?.1@97.469,76.267 cw(c98.532,75.204) 98.532,76.708 ; ?.1@97.469,76.267 cw(c98.532,75.204) 98.532,76.708 ; ?.1@97.469,77.149 ccw(c98.532,78.212) 98.532,76.708 ; ?.1@97.469,77.149 ccw(c98.532,78.212) 98.532,76.708 ; ?.1@97.469,77.149 ccw(c98.532,78.212) 98.532,76.708 ; ?.1@97.469,77.149 ccw(c98.532,78.212) 98.532,76.708 ; C5.1@101.241,38.757 cw(c100.374,37.89) 101.6,37.89 ; C5.1@101.241,38.757 cw(c100.374,37.89) 101.6,37.89 ; C5.1@101.241,38.757 cw(c100.374,37.89) 101.6,37.89 ; C5.1@101.241,38.757 cw(c100.374,37.89) 101.6,37.89 ; C5.1@101.241,38.757 cw(c100.374,37.89) 101.6,37.89 ; C5.1@101.241,38.757 cw(c100.374,37.89) 101.6,37.89 ; C5.1@101.241,38.757 cw(c100.374,37.89) 101.6,37.89 ; C5.1@101.241,38.757 cw(c100.374,37.89) 101.6,37.89 ; C5.1@101.241,38.757 cw(c100.374,37.89) 101.6,37.89 ; 101.6,37.89 cw(c102.826,37.89) C5.1@101.959,38.757 ; 101.6,37.89 cw(c102.826,37.89) C5.1@101.959,38.757 ; 101.6,37.89 cw(c102.826,37.89) C5.1@101.959,38.757 ; 101.6,37.89 cw(c102.826,37.89) C5.1@101.959,38.757 ; 101.6,37.89 cw(c102.826,37.89) C5.1@101.959,38.757 ; 101.6,37.89 cw(c102.826,37.89) C5.1@101.959,38.757 ; 101.6,37.89 cw(c102.826,37.89) C5.1@101.959,38.757 ; 101.6,37.89 cw(c102.826,37.89) C5.1@101.959,38.757 ; 101.6,37.89 cw(c102.826,37.89) C5.1@101.959,38.757 ; U1.40@104.424,100.108 ccw(c105.424,101.109) 105.424,99.694 ; U1.40@104.424,100.108 ccw(c105.424,101.109) 105.424,99.694 ; U1.40@104.424,100.108 ccw(c105.424,101.109) 105.424,99.694 ; U1.40@104.424,100.108 ccw(c105.424,101.109) 105.424,99.694 ; U1.31@104.471,77.134 ccw(c105.194,77.857) 105.194,76.834 ; U1.31@104.471,77.134 ccw(c105.194,77.857) 105.194,76.834 ; U1.31@104.471,77.134 ccw(c105.194,77.857) 105.194,76.834 ; U1.31@104.471,77.134 ccw(c105.194,77.857) 105.194,76.834 ; U1.40@104.603,99.227 cw(c105.731,98.1) 105.731,99.694 ; U1.40@104.603,99.227 cw(c105.731,98.1) 105.731,99.694 ; U1.40@104.603,99.227 cw(c105.731,98.1) 105.731,99.694 ; U1.40@104.603,99.227 cw(c105.731,98.1) 105.731,99.694 ; U1.40@104.603,99.227 cw(c105.731,98.1) 105.731,99.694 ; U1.40@104.603,99.227 cw(c105.731,98.1) 105.731,99.694 ; U1.40@104.603,99.354 cw(c105.424,98.533) 105.424,99.694 ; U1.40@104.603,99.354 cw(c105.424,98.533) 105.424,99.694 ; U1.40@104.603,99.354 cw(c105.424,98.533) 105.424,99.694 ; U1.40@104.603,99.354 cw(c105.424,98.533) 105.424,99.694 ; U1.40@104.603,100.161 ccw(c105.731,101.288) 105.731,99.694 ; U1.40@104.603,100.161 ccw(c105.731,101.288) 105.731,99.694 ; U1.40@104.603,100.161 ccw(c105.731,101.288) 105.731,99.694 ; U1.40@104.603,100.161 ccw(c105.731,101.288) 105.731,99.694 ; U1.40@104.603,100.161 ccw(c105.731,101.288) 105.731,99.694 ; U1.40@104.603,100.161 ccw(c105.731,101.288) 105.731,99.694 ; U1.40@104.603,100.288 ccw(c106.037,101.722) 106.037,99.694 ; U1.40@104.603,100.288 ccw(c106.037,101.722) 106.037,99.694 ; U1.40@104.603,100.288 ccw(c106.037,101.722) 106.037,99.694 ; U1.40@104.603,100.288 ccw(c106.037,101.722) 106.037,99.694 ; U1.31@104.651,76.609 cw(c105.194,76.065) 105.194,76.834 ; U1.31@104.651,76.609 cw(c105.194,76.065) 105.194,76.834 ; U1.31@104.651,76.609 cw(c105.194,76.065) 105.194,76.834 ; U1.31@104.651,76.609 cw(c105.194,76.065) 105.194,76.834 ; U1.31@104.651,77.313 ccw(c105.807,78.47) 105.807,76.834 ; U1.31@104.651,77.313 ccw(c105.807,78.47) 105.807,76.834 ; U1.31@104.651,77.313 ccw(c105.807,78.47) 105.807,76.834 ; U1.31@104.651,77.313 ccw(c105.807,78.47) 105.807,76.834 ; C2.1@107.845,38.757 cw(c106.978,37.89) 108.204,37.89 ; C2.1@107.845,38.757 cw(c106.978,37.89) 108.204,37.89 ; C2.1@107.845,38.757 cw(c106.978,37.89) 108.204,37.89 ; C2.1@107.845,38.757 cw(c106.978,37.89) 108.204,37.89 ; C2.1@107.845,38.757 cw(c106.978,37.89) 108.204,37.89 ; C2.1@107.845,38.757 cw(c106.978,37.89) 108.204,37.89 ; C2.1@107.845,38.757 cw(c106.978,37.89) 108.204,37.89 ; C2.1@107.845,38.757 cw(c106.978,37.89) 108.204,37.89 ; C2.1@107.845,38.757 cw(c106.978,37.89) 108.204,37.89 ; C2.1@107.845,39.475 ccw(c106.978,40.342) 108.204,40.342 ; C2.1@107.845,39.475 ccw(c106.978,40.342) 108.204,40.342 ; C2.1@107.845,39.475 ccw(c106.978,40.342) 108.204,40.342 ; 108.204,37.89 cw(c109.43,37.89) C2.1@108.563,38.757 ; 108.204,37.89 cw(c109.43,37.89) C2.1@108.563,38.757 ; 108.204,37.89 cw(c109.43,37.89) C2.1@108.563,38.757 ; 108.204,37.89 cw(c109.43,37.89) C2.1@108.563,38.757 ; 108.204,37.89 cw(c109.43,37.89) C2.1@108.563,38.757 ; 108.204,37.89 cw(c109.43,37.89) C2.1@108.563,38.757 ; 108.204,37.89 cw(c109.43,37.89) C2.1@108.563,38.757 ; 108.204,37.89 cw(c109.43,37.89) C2.1@108.563,38.757 ; 108.204,37.89 cw(c109.43,37.89) C2.1@108.563,38.757 ; 108.204,40.342 ccw(c109.43,40.342) C2.1@108.563,39.475 ; 108.204,40.342 ccw(c109.43,40.342) C2.1@108.563,39.475 ; 108.204,40.342 ccw(c109.43,40.342) C2.1@108.563,39.475 ; 111.243,48.26 cw(c111.243,46.727) key.1@112.327,47.811 ; 111.243,48.26 ccw(c111.243,49.793) key.1@112.327,48.709 ; 111.243,48.26 cw(c111.243,46.727) key.1@112.327,47.811 ; 111.243,48.26 ccw(c111.243,49.793) key.1@112.327,48.709 ; 111.243,48.26 ccw(c111.243,49.793) key.1@112.327,48.709 ; 111.243,48.26 cw(c111.243,46.727) key.1@112.327,47.811 ; 111.243,48.26 ccw(c111.243,49.793) key.1@112.327,48.709 ; 111.243,48.26 cw(c111.243,46.727) key.1@112.327,47.811 ; 111.243,48.26 ccw(c111.243,49.793) key.1@112.327,48.709 ; 111.243,48.26 cw(c111.243,46.727) key.1@112.327,47.811 ; 111.243,48.26 ccw(c111.243,49.793) key.1@112.327,48.709 ; 111.243,48.26 cw(c111.243,46.727) key.1@112.327,47.811 ; 111.243,48.26 ccw(c111.243,49.793) key.1@112.327,48.709 ; 111.243,48.26 cw(c111.243,46.727) key.1@112.327,47.811 ; 111.243,48.26 ccw(c111.243,49.793) key.1@112.327,48.709 ; 111.243,48.26 cw(c111.243,46.727) key.1@112.327,47.811 ; 111.243,48.26 ccw(c111.243,49.793) key.1@112.327,48.709 ; 111.243,48.26 cw(c111.243,46.727) key.1@112.327,47.811 ; 111.692,47.176 cw(c112.776,46.092) key.1@112.776,47.625 ; 111.692,47.176 ccw(c110.608,48.26) key.1@112.141,48.26 ; 111.692,47.176 cw(c112.776,46.092) key.1@112.776,47.625 ; 111.692,47.176 ccw(c110.608,48.26) key.1@112.141,48.26 ; 111.692,47.176 ccw(c110.608,48.26) key.1@112.141,48.26 ; 111.692,47.176 cw(c112.776,46.092) key.1@112.776,47.625 ; 111.856,48.26 cw(c111.856,47.34) key.1@112.507,47.991 ; 111.856,48.26 ccw(c111.856,49.18) key.1@112.507,48.529 ; 111.856,48.26 cw(c111.856,47.34) key.1@112.507,47.991 ; 111.856,48.26 ccw(c111.856,49.18) key.1@112.507,48.529 ; 111.856,48.26 ccw(c111.856,49.18) key.1@112.507,48.529 ; 111.856,48.26 cw(c111.856,47.34) key.1@112.507,47.991 ; 111.856,48.26 ccw(c111.856,49.18) key.1@112.507,48.529 ; 111.856,48.26 cw(c111.856,47.34) key.1@112.507,47.991 ; 111.856,48.26 ccw(c111.856,49.18) key.1@112.507,48.529 ; 111.856,48.26 cw(c111.856,47.34) key.1@112.507,47.991 ; 111.856,48.26 ccw(c111.856,49.18) key.1@112.507,48.529 ; 111.856,48.26 cw(c111.856,47.34) key.1@112.507,47.991 ; 111.856,48.26 ccw(c111.856,49.18) key.1@112.507,48.529 ; 111.856,48.26 cw(c111.856,47.34) key.1@112.507,47.991 ; 111.856,48.26 ccw(c111.856,49.18) key.1@112.507,48.529 ; 111.856,48.26 cw(c111.856,47.34) key.1@112.507,47.991 ; 111.856,48.26 ccw(c111.856,49.18) key.1@112.507,48.529 ; 111.856,48.26 cw(c111.856,47.34) key.1@112.507,47.991 ; 112.126,47.61 cw(c112.776,46.959) key.1@112.776,47.879 ; 112.126,47.61 ccw(c111.475,48.26) key.1@112.395,48.26 ; 112.126,47.61 cw(c112.776,46.959) key.1@112.776,47.879 ; 112.126,47.61 ccw(c111.475,48.26) key.1@112.395,48.26 ; 112.126,47.61 ccw(c111.475,48.26) key.1@112.395,48.26 ; 112.126,47.61 cw(c112.776,46.959) key.1@112.776,47.879
pads on no net: J61.1 J61.9 J61.10 J61.11 JP5.3 key.0 key.3 key.4 key.5 U1.29 U1.30 U4.11 U4.12 U4.13 U4.14

## Polygon pours and split planes (outlines as drawn)
no net on Top Layer (hatched 45Degree grid 0.508 track 0.203): 62.738,117.729 115.824,117.729 115.824,34.163 62.865,34.163 62.865,117.729
no net on Bottom Layer (hatched 45Degree grid 0.508 track 0.203): 62.865,117.602 115.824,117.602 115.824,34.29 62.865,34.29

## Keep-outs
Keep-Out Layer:
  lines w0.6: 62.23,118.11 62.23,33.782 62.23,33.528 116.332,33.528 ; 62.484,118.237 116.205,118.237 ; 116.459,33.655 116.459,118.11

## Silkscreen, mask and mechanical layers (free items; w line width, h text height)
Top Overlay:
  drawing of 661 lines, arcs and shapes, not listed
  text "VCC" at 64.046,110.743 h1.52
  text "GND" at 82.407,98.931 h1.52
  text "GND" at 105.791,98.933 h1.52
  text "GND" at 63.881,98.044 h1.52
  text "P0.0" at 105.791,96.52 h1.32
  text "P1.0" at 82.169,96.266 h1.32
  text "P0.7" at 105.156,78.613 h1.32
  text "P1.7" at 83.185,78.232 h1.32
  text "GND" at 82.804,71.501 h1.52
  text "GND" at 105.956,71.494 h1.52
  text "P2.7" at 105.537,68.834 h1.32
  text "P3.0" at 82.804,68.58 h1.32
  text "4" at 64.897,64.643 h1.52
  text "6" at 67.691,64.643 h1.52
  text "8" at 72.644,64.516 h1.52
  text "7" at 75.438,64.516 h1.52
  text "http://www.ourhc.cn" at 115.443,59.309 h1.76 r90
  text "P3.7" at 82.55,51.054 h1.32
  text "P2.0" at 105.791,50.8 h1.32
  text "MAX232" at 72.136,45.466 h1.52 r90
Mechanical 1:
  lines w0.254: 55.247,35.18 55.753,33.655 ; 55.37,116.714 55.88,118.237 ; 55.499,33.655 56.007,33.655 ; 55.626,118.237 56.134,118.237 ; 55.803,67.287 55.753,33.655 ; 55.83,84.605 55.88,118.237 ; 56.263,35.178 55.753,33.655 ; 56.386,116.712 55.88,118.237 ; 61.973,121.666 61.979,121.158 ; 63.494,121.938 61.976,121.412 ; 63.506,120.922 61.976,121.412 ; 80.432,121.627 61.976,121.412 ; 98.003,121.832 116.459,122.047 ; 114.929,122.537 116.459,122.047 ; 114.941,121.521 116.459,122.047 ; 116.456,122.301 116.462,121.793
  text "54.4867 (mm)" at 80.697,120.716 h1.52 r0.67
  text "84.5821 (mm)" at 56.718,67.54 h1.52 r89.91